# EAGLE board MCP23017_O8_v1_0 (EAGLE 9.6.2)
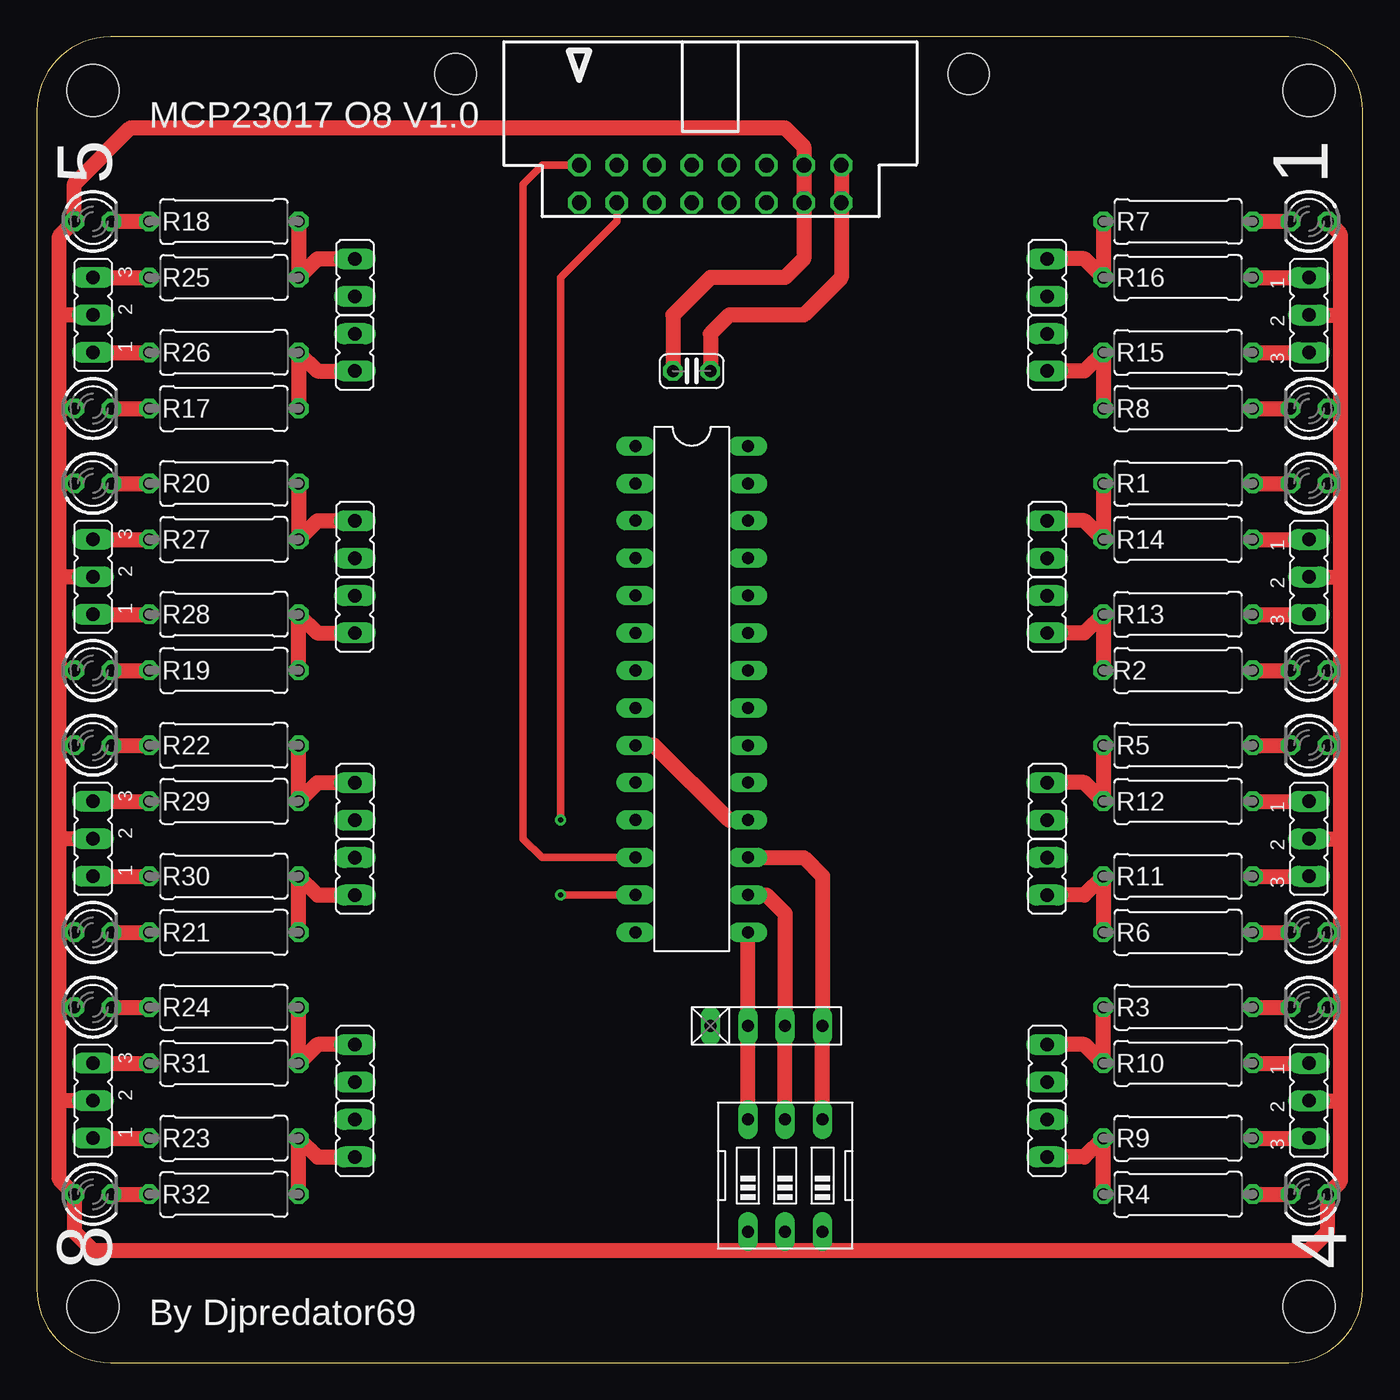
[diagram p0: board, top side]
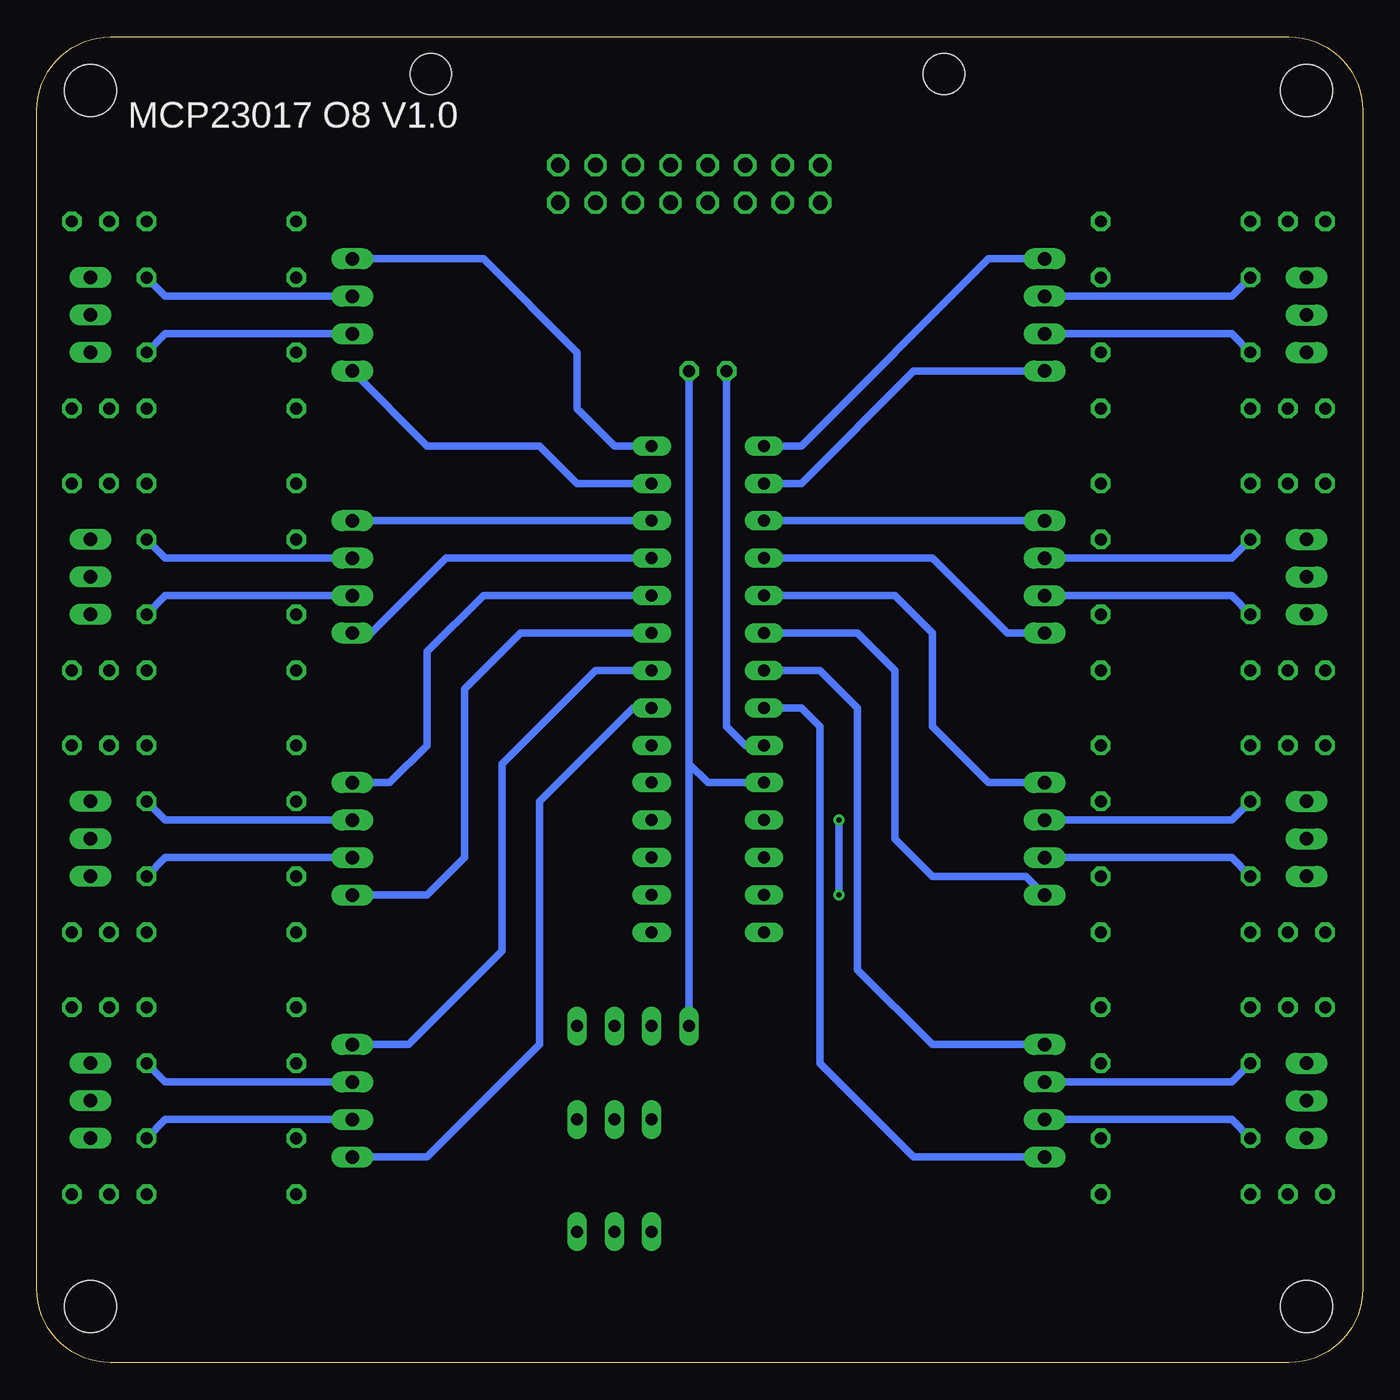
[diagram p1: board, bottom side, seen from below]

Size 90 x 90 mm. Coordinates in mm from the lower left corner, seen from the top.
Outline: 0,85 0,5 arc90 5,0 85,0 arc90 90,5 90,85 arc90 85,90 5,90 arc90 0,85
Copper layers (1*16): Top 0.035mm / dielectric 1.5mm / Bottom 0.035mm
Design rules "default": minimum track width 6mil, minimum drill 0.35mm, track to track 6mil, track to pad 6mil, pad to pad 6mil, via to via 6mil, smd to smd 6mil, copper to edge 40mil, drill to drill 6mil, minimum pad ring 10mil, minimum via ring 8mil, stop-mask expansion 4mil, vias tented up to drill 0mil, thermal gap 10mil
Holes 3.5 mm at 86.36,86.36 3.81,86.36 3.81,3.81 86.36,3.81

## Footprints (pad centres in the part's own frame; a part is rotated, then mirrored left to right if it is on the bottom)
C025-024X044 = drill 0.813 octagon: 1 -1.27,0; 2 1.27,0
DIL28-3 = drill 0.813 long: 1 -16.51,-3.81; 2 -13.97,-3.81; 3 -11.43,-3.81; 4 -8.89,-3.81; 5 -6.35,-3.81; 6 -3.81,-3.81; 7 -1.27,-3.81; 8 1.27,-3.81; 9 3.81,-3.81; 10 6.35,-3.81; 11 8.89,-3.81; 12 11.43,-3.81; 13 13.97,-3.81; 14 16.51,-3.81; 15 16.51,3.81; 16 13.97,3.81; 17 11.43,3.81; 18 8.89,3.81; 19 6.35,3.81; 20 3.81,3.81; 21 1.27,3.81; 22 -1.27,3.81; 23 -3.81,3.81; 24 -6.35,3.81; 25 -8.89,3.81; 26 -11.43,3.81; 27 -13.97,3.81; 28 -16.51,3.81
JP2 = drill 0.914 long: 1 -2.54,0; 2 0,0; 3 2.54,0
JP1 = drill 0.914 long: 1 0,-1.27; 2 0,1.27
0309/10 = drill 0.813 octagon: 1 -5.08,0; 2 5.08,0
RN-3 = drill 0.813 long: 1 -5.08,0; 2 -2.54,0; 3 0,0; 4 2.54,0
LED3MM = drill 0.813 octagon: A -1.27,0; K 1.27,0
EDG-03 = drill 0.813 long: 1 -2.54,-3.81; 2 0,-3.81; 3 2.54,-3.81; 4 2.54,3.81; 5 0,3.81; 6 -2.54,3.81
057-016-0 = drill 1 octagon: 1 -8.89,-5.08; 2 -8.89,-2.54; 3 -6.35,-5.08; 4 -6.35,-2.54; 5 -3.81,-5.08; 6 -3.81,-2.54; 7 -1.27,-5.08; 8 -1.27,-2.54; 9 1.27,-5.08; 10 1.27,-2.54; 11 3.81,-5.08; 12 3.81,-2.54; 13 6.35,-5.08; 14 6.35,-2.54; 15 8.89,-5.08; 16 8.89,-2.54 | hole 2.8: -17.29,3.66; 17.54,3.66

## Placement (x,y rotation side)
C2  100nF  [C025-024X044]  44.45,67.31 0 top
IC5  MCP23017SP  [DIL28-3]  44.45,45.72 270 top
JP1  [JP2]  86.36,17.78 270 top
JP2  [JP2]  3.81,71.12 90 top
JP3  [JP2]  86.36,35.56 270 top
JP4  [JP2]  3.81,53.34 90 top
JP5  [JP2]  86.36,53.34 270 top
JP6  [JP2]  3.81,35.56 90 top
JP7  [JP2]  86.36,71.12 270 top
JP8  [JP2]  3.81,17.78 90 top
JP9  [JP1]  68.58,15.24 180 top
JP10  [JP1]  68.58,33.02 180 top
JP11  [JP1]  68.58,38.1 0 top
JP12  [JP1]  68.58,50.8 180 top
JP13  [JP1]  68.58,55.88 0 top
JP14  [JP1]  68.58,68.58 180 top
JP15  [JP1]  68.58,73.66 0 top
JP16  [JP1]  68.58,20.32 0 top
JP17  [JP1]  21.59,73.66 0 top
JP18  [JP1]  21.59,55.88 0 top
JP19  [JP1]  21.59,50.8 180 top
JP20  [JP1]  21.59,38.1 0 top
JP21  [JP1]  21.59,33.02 180 top
JP22  [JP1]  21.59,20.32 0 top
JP23  [JP1]  21.59,15.24 180 top
JP24  [JP1]  21.59,68.58 180 top
R1  470R  [0309/10]  77.47,59.69 180 top
R2  470R  [0309/10]  77.47,46.99 180 top
R3  470R  [0309/10]  77.47,24.13 180 top
R4  470R  [0309/10]  77.47,11.43 180 top
R5  470R  [0309/10]  77.47,41.91 180 top
R6  470R  [0309/10]  77.47,29.21 180 top
R7  470R  [0309/10]  77.47,77.47 180 top
R8  470R  [0309/10]  77.47,64.77 180 top
R9  470R  [0309/10]  77.47,15.24 0 top
R10  470R  [0309/10]  77.47,20.32 0 top
R11  470R  [0309/10]  77.47,33.02 0 top
R12  470R  [0309/10]  77.47,38.1 0 top
R13  470R  [0309/10]  77.47,50.8 0 top
R14  470R  [0309/10]  77.47,55.88 0 top
R15  470R  [0309/10]  77.47,68.58 0 top
R16  470R  [0309/10]  77.47,73.66 0 top
R17  470R  [0309/10]  12.7,64.77 0 top
R18  470R  [0309/10]  12.7,77.47 0 top
R19  470R  [0309/10]  12.7,46.99 0 top
R20  470R  [0309/10]  12.7,59.69 0 top
R21  470R  [0309/10]  12.7,29.21 0 top
R22  470R  [0309/10]  12.7,41.91 0 top
R23  470R  [0309/10]  12.7,11.43 0 top
R24  470R  [0309/10]  12.7,24.13 0 top
R25  470R  [0309/10]  12.7,73.66 180 top
R26  470R  [0309/10]  12.7,68.58 180 top
R27  470R  [0309/10]  12.7,55.88 180 top
R28  470R  [0309/10]  12.7,50.8 180 top
R29  470R  [0309/10]  12.7,38.1 180 top
R30  470R  [0309/10]  12.7,33.02 180 top
R31  470R  [0309/10]  12.7,20.32 180 top
R32  470R  [0309/10]  12.7,15.24 180 top
RN2  [RN-3]  50.8,22.86 0 top
SIG_1  [LED3MM]  86.36,11.43 180 top
SIG_2  [LED3MM]  86.36,24.13 180 top
SIG_3  [LED3MM]  86.36,29.21 180 top
SIG_4  [LED3MM]  86.36,41.91 180 top
SIG_5  [LED3MM]  86.36,46.99 180 top
SIG_6  [LED3MM]  86.36,59.69 180 top
SIG_7  [LED3MM]  86.36,64.77 180 top
SIG_8  [LED3MM]  86.36,77.47 180 top
SIG_9  [LED3MM]  3.81,64.77 0 top
SIG_10  [LED3MM]  3.81,77.47 0 top
SIG_11  [LED3MM]  3.81,46.99 0 top
SIG_12  [LED3MM]  3.81,59.69 0 top
SIG_13  [LED3MM]  3.81,29.21 0 top
SIG_14  [LED3MM]  3.81,41.91 0 top
SIG_15  [LED3MM]  3.81,11.43 0 top
SIG_16  [LED3MM]  3.81,24.13 0 top
SW1  [EDG-03]  50.8,12.7 0 top
X4  057-016-0  [057-016-0]  45.72,83.82 0 top

## Library data of the parts
C2 R1-R32 = resistor
IC5 = microchip-6
JP1-JP24 = jumper
RN2 = resistor-net_edit; OC_FARNELL: unknown; OC_NEWARK: unknown
SIG_1-SIG_16 = led
SW1 = special
X4 = con-panduit; OC_FARNELL: unknown; OC_NEWARK: unknown

## Nets
GND2: C2.2 IC5.10 RN2.1 X4.15 X4.16
N$1: JP1.3 JP9.1 R9.2
N$3: R2.1 SIG_5.K
N$4: R1.1 SIG_6.K
N$5: IC5.27 JP14.2 R8.2 R15.1
N$6: IC5.17 RN2.4 SW1.4
N$7: R8.1 SIG_7.K
N$8: R7.1 SIG_8.K
N$9: JP1.1 JP16.1 R10.2
N$10: JP3.3 JP10.1 R11.2
N$11: JP3.1 JP11.1 R12.2
N$13: JP5.3 JP12.1 R13.2
N$22: IC5.22 JP16.2 R3.2 R10.1
N$24: IC5.24 JP11.2 R5.2 R12.1
N$26: IC5.26 JP13.2 R1.2 R14.1
N$28: IC5.28 JP15.2 R7.2 R16.1
N$29: IC5.21 JP9.2 R4.2 R9.1
N$30: JP5.1 JP13.1 R14.2
N$32: JP7.3 JP14.1 R15.2
N$33: JP7.1 JP15.1 R16.2
N$35: IC5.16 RN2.3 SW1.5
N$36: R4.1 SIG_1.K
N$37: R3.1 SIG_2.K
N$41: IC5.23 JP10.2 R6.2 R11.1
N$43: IC5.25 JP12.2 R2.2 R13.1
N$49: IC5.1 JP17.2 R18.2 R25.1
N$51: IC5.3 JP18.2 R20.2 R27.1
N$53: R6.1 SIG_3.K
N$54: R5.1 SIG_4.K
N$56: IC5.6 JP21.2 R21.2 R30.1
N$58: IC5.8 JP23.2 R23.2 R32.1
N$60: IC5.2 JP24.2 R17.2 R26.1
N$61: R18.1 SIG_10.K
N$62: R17.1 SIG_9.K
N$64: IC5.4 JP19.2 R19.2 R28.1
N$65: IC5.5 JP20.2 R22.2 R29.1
N$66: R20.1 SIG_12.K
N$67: R19.1 SIG_11.K
N$69: R22.1 SIG_14.K
N$70: R21.1 SIG_13.K
N$71: IC5.7 JP22.2 R24.2 R31.1
N$72: R24.1 SIG_16.K
N$73: R23.1 SIG_15.K
N$74: JP2.3 JP17.1 R25.2
N$75: JP2.1 JP24.1 R26.2
N$76: JP4.3 JP18.1 R27.2
N$77: JP4.1 JP19.1 R28.2
N$78: JP6.3 JP20.1 R29.2
N$79: JP6.1 JP21.1 R30.2
N$80: JP8.3 JP22.1 R31.2
N$81: JP8.1 JP23.1 R32.2
N$82: IC5.12 X4.2
N$84: IC5.13 X4.3
N$85: IC5.15 RN2.2 SW1.6
VCC5.1: C2.1 IC5.9 IC5.18 JP1.2 JP2.2 JP3.2 JP4.2 JP5.2 JP6.2 JP7.2 JP8.2 SIG_1.A SIG_2.A SIG_3.A SIG_4.A SIG_5.A SIG_6.A SIG_7.A SIG_8.A SIG_9.A SIG_10.A SIG_11.A SIG_12.A SIG_13.A SIG_14.A SIG_15.A SIG_16.A SW1.1 SW1.2 SW1.3 X4.13 X4.14

## Tracks (layer width: path | path; a pad name or v marks a point on that pad's centre or on a via)
GND2
  Top 1.016: X4.16 X4.15 54.61,73.66 52.07,71.12 46.99,71.12 45.72,69.85 C2.2
  Bottom 0.508: C2.2 45.72,40.64 | 45.72,40.64 44.45,39.37 IC5.10 | RN2.1 45.72,40.64
N$1
  Top 1.016: R9.2 JP1.3
  Bottom 0.508: JP9.1 81.28,16.51 R9.2
N$3
  Top 1.016: R2.1 SIG_5.K
N$4
  Top 1.016: R1.1 SIG_6.K
N$5
  Top 1.016: R8.2 R15.1 71.12,67.31 JP14.2
  Bottom 0.508: JP14.2 63.5,62.23 55.88,62.23 53.34,59.69 IC5.27
N$6
  Top 1.016: SW1.4 RN2.4 53.34,33.02 52.07,34.29 IC5.17
N$7
  Top 1.016: R8.1 SIG_7.K
N$8
  Top 1.016: R7.1 SIG_8.K
N$9
  Top 1.016: R10.2 JP1.1
  Bottom 0.508: JP16.1 81.28,19.05 R10.2
N$10
  Top 1.016: R11.2 JP3.3
  Bottom 0.508: JP10.1 81.28,34.29 R11.2
N$11
  Top 1.016: R12.2 JP3.1
  Bottom 0.508: JP11.1 81.28,36.83 R12.2
N$13
  Top 1.016: R13.2 JP5.3
  Bottom 0.508: JP12.1 81.28,52.07 R13.2
N$22
  Top 1.016: R3.2 R10.1 71.12,21.59 JP16.2
  Bottom 0.508: JP16.2 64.77,21.59 58.42,27.94 58.42,40.64 52.07,46.99 IC5.22
N$24
  Top 1.016: R5.2 R12.1 71.12,39.37 JP11.2
  Bottom 0.508: JP11.2 66.04,39.37 63.5,41.91 63.5,48.26 59.69,52.07 IC5.24
N$26
  Top 1.016: R1.2 R14.1 71.12,57.15 JP13.2
  Bottom 0.508: JP13.2 IC5.26
N$28
  Top 1.016: R7.2 R16.1 71.12,74.93 JP15.2
  Bottom 0.508: JP15.2 59.69,74.93 53.34,68.58 53.34,64.77 50.8,62.23 IC5.28
N$29
  Top 1.016: R4.2 R9.1 71.12,13.97 JP9.2
  Bottom 0.508: JP9.2 63.5,13.97 55.88,21.59 55.88,38.1 49.53,44.45 IC5.21
N$30
  Top 1.016: R14.2 JP5.1
  Bottom 0.508: JP13.1 81.28,54.61 R14.2
N$32
  Top 1.016: R15.2 JP7.3
  Bottom 0.508: JP14.1 81.28,69.85 R15.2
N$33
  Top 1.016: R16.2 JP7.1
  Bottom 0.508: JP15.1 81.28,72.39 R16.2
N$35
  Top 1.016: SW1.5 RN2.3 50.8,30.48 49.53,31.75 IC5.16
N$36
  Top 1.016: R4.1 SIG_1.K
N$37
  Top 1.016: R3.1 SIG_2.K
N$41
  Top 1.016: R6.2 R11.1 71.12,31.75 JP10.2
  Bottom 0.508: JP10.2 63.5,31.75 60.96,34.29 60.96,45.72 57.15,49.53 IC5.23
N$43
  Top 1.016: R2.2 R13.1 71.12,49.53 JP12.2
  Bottom 0.508: JP12.2 67.31,49.53 62.23,54.61 IC5.25
N$49
  Top 1.016: R18.2 R25.1 19.05,74.93 JP17.2
  Bottom 0.508: JP17.2 25.4,74.93 38.1,62.23 IC5.1
N$51
  Top 1.016: R20.2 R27.1 19.05,57.15 JP18.2
  Bottom 0.508: JP18.2 IC5.3
N$53
  Top 1.016: R6.1 SIG_3.K
N$54
  Top 1.016: R5.1 SIG_4.K
N$56
  Top 1.016: R21.2 R30.1 19.05,31.75 JP21.2
  Bottom 0.508: JP21.2 22.86,33.02 29.21,33.02 31.75,35.56 31.75,46.99 34.29,49.53 IC5.6
N$58
  Top 1.016: R23.2 R32.1 19.05,13.97 JP23.2
  Bottom 0.508: JP23.2 30.48,13.97 36.83,20.32 36.83,43.18 38.1,44.45 IC5.8
N$60
  Top 1.016: R17.2 R26.1 19.05,67.31 JP24.2
  Bottom 0.508: JP24.2 30.48,67.31 38.1,59.69 IC5.2
N$61
  Top 1.016: SIG_10.K R18.1
N$62
  Top 1.016: SIG_9.K R17.1
N$64
  Top 1.016: R19.2 R28.1 19.05,49.53 JP19.2
  Bottom 0.508: JP19.2 24.13,49.53 29.21,54.61 IC5.4
N$65
  Top 1.016: R22.2 R29.1 19.05,39.37 JP20.2
  Bottom 0.508: JP20.2 25.4,39.37 29.21,43.18 29.21,49.53 31.75,52.07 IC5.5
N$66
  Top 1.016: SIG_12.K R20.1
N$67
  Top 1.016: SIG_11.K R19.1
N$69
  Top 1.016: SIG_14.K R22.1
N$70
  Top 1.016: SIG_13.K R21.1
N$71
  Top 1.016: R24.2 R31.1 19.05,21.59 JP22.2
  Bottom 0.508: JP22.2 29.21,21.59 34.29,26.67 34.29,44.45 36.83,46.99 IC5.7
N$72
  Top 1.016: SIG_16.K R24.1
N$73
  Top 1.016: SIG_15.K R23.1
N$74
  Top 1.016: JP2.3 R25.2
  Bottom 0.508: JP17.1 8.89,72.39 R25.2
N$75
  Top 1.016: JP2.1 R26.2
  Bottom 0.508: JP24.1 8.89,69.85 R26.2
N$76
  Top 1.016: JP4.3 R27.2
  Bottom 0.508: JP18.1 8.89,54.61 R27.2
N$77
  Top 1.016: JP4.1 R28.2
  Bottom 0.508: JP19.1 8.89,52.07 R28.2
N$78
  Top 1.016: JP6.3 R29.2
  Bottom 0.508: JP20.1 8.89,36.83 R29.2
N$79
  Top 1.016: JP6.1 R30.2
  Bottom 0.508: JP21.1 8.89,34.29 R30.2
N$80
  Top 1.016: JP8.3 R31.2
  Bottom 0.508: JP22.1 8.89,19.05 R31.2
N$81
  Top 1.016: JP8.1 R32.2
  Bottom 0.508: JP23.1 8.89,16.51 R32.2
N$82
  Top 0.508: X4.2 34.29,81.28 33.02,80.01 33.02,35.56 34.29,34.29 IC5.12
N$84  (via drill 0.35)
  Top 0.508: X4.3 39.37,77.47 35.56,73.66 v35.56,36.83 | v35.56,31.75 IC5.13
  Bottom 0.508: v35.56,36.83 v35.56,31.75
N$85
  Top 1.016: SW1.6 RN2.2 IC5.15
VCC5.1
  Top 1.016: 1.52,17.78 1.52,12.45 SIG_15.A 2.54,8.89 3.81,7.62 48.26,7.62 | 1.52,17.78 1.52,24.13 | 1.52,24.13 1.52,29.21 | 1.52,29.21 1.52,35.56 | 1.52,35.56 1.52,41.91 | 1.52,41.91 1.52,46.99 | 1.52,46.99 1.52,53.34 | 1.52,53.34 1.52,59.69 | 1.52,59.69 1.52,64.77 | 1.52,64.77 1.52,71.12 | 1.52,71.12 1.52,76.45 SIG_10.A 2.54,80.01 6.35,83.82 50.8,83.82 52.07,82.55 X4.14 X4.13 52.07,74.93 50.8,73.66 45.72,73.66 43.18,71.12 C2.1 | JP2.2 1.52,71.12 | SIG_9.A 1.52,64.77 | SIG_12.A 1.52,59.69 | SIG_11.A 1.52,46.99 | JP4.2 1.52,53.34 | SIG_14.A 1.52,41.91 | JP6.2 1.52,35.56 | SIG_16.A 1.52,24.13 | SIG_13.A 1.52,29.21 | JP8.2 1.52,17.78 | SIG_8.A 88.48,76.62 88.48,71.12 | 88.48,71.12 88.48,64.77 | 88.48,64.77 88.48,59.69 | 88.48,59.69 88.48,53.34 | 88.48,53.34 88.48,46.99 | 88.48,46.99 88.48,41.91 | 88.48,41.91 88.48,35.56 | 88.48,35.56 88.48,29.21 | 88.48,29.21 88.48,24.13 | 88.48,24.13 88.48,17.78 | 88.48,17.78 88.48,12.28 SIG_1.A 87.63,8.89 86.36,7.62 53.34,7.62 | JP1.2 88.48,17.78 | SIG_2.A 88.48,24.13 | SIG_3.A 88.48,29.21 | JP3.2 88.48,35.56 | SIG_4.A 88.48,41.91 | SIG_5.A 88.48,46.99 | JP5.2 88.48,53.34 | SIG_6.A 88.48,59.69 | SIG_7.A 88.48,64.77 | JP7.2 88.48,71.12 | 48.26,7.62 50.8,7.62 | 50.8,7.62 53.34,7.62 | SW1.1 48.26,7.62 | SW1.2 50.8,7.62 | SW1.3 53.34,7.62 | IC5.18 46.99,36.83 41.91,41.91 IC5.9
  Bottom 0.508: C2.1 43.18,43.18 41.91,41.91 IC5.9

## Text on the board
tNames: MCP23017 O8 V1.0 | 5 | 1 | 8 | 4 | By Djpredator69
bNames: MCP23017 O8 V1.0